# Altium PCB PCB1.PcbDoc
Units mm, origin at the board's own origin, x right, y up, seen from the top; angles counter-clockwise.
Board outline 120 x 25 mm, 2 copper layers (Top Layer, Bottom Layer); 41 components, 34 nets, 152 pads, 135 vias.
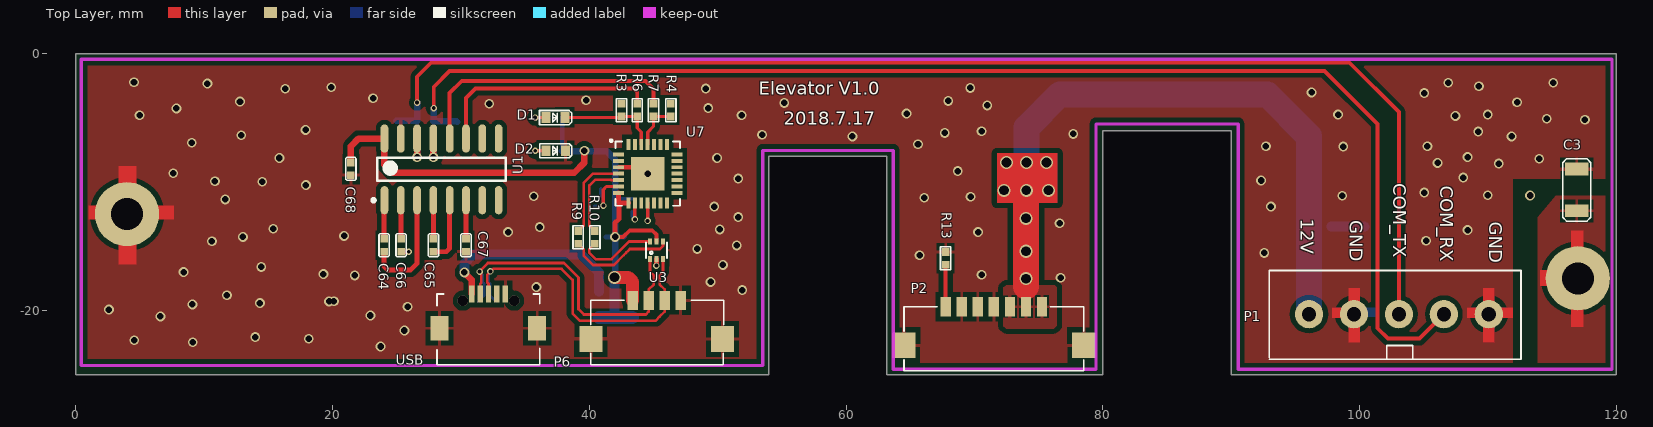
[diagram p0: Top Layer view]
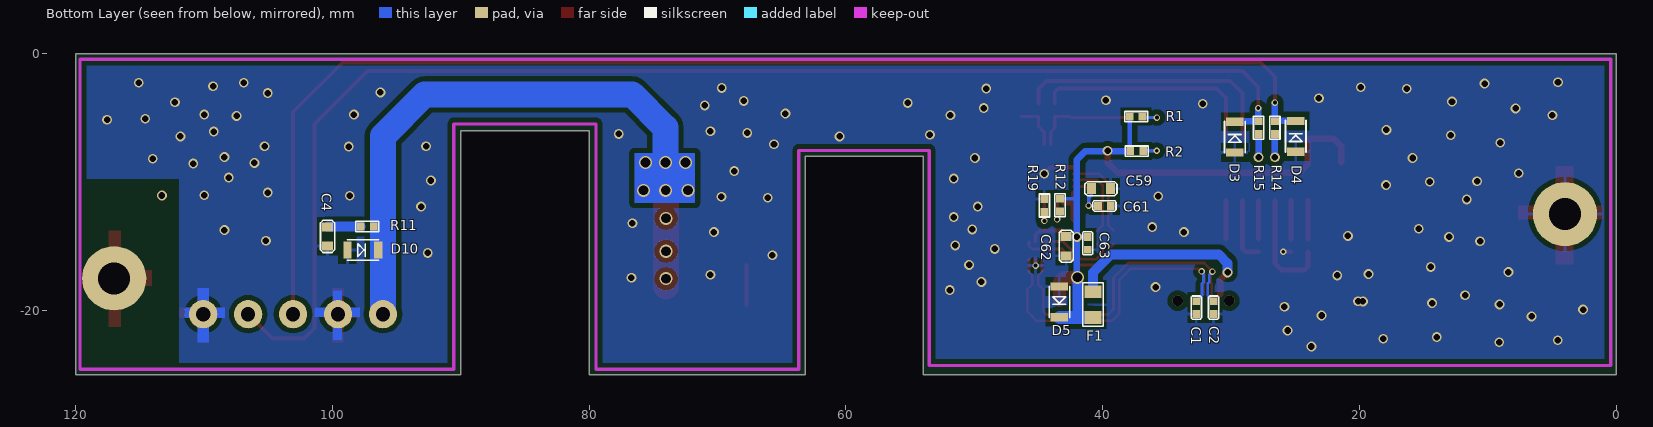
[diagram p1: Bottom Layer view, seen from below]

## Layer stack, top to bottom
Top Layer: signal copper 0.0356
Dielectric: dielectric 0.32, FR-4, Dk 4.8
Bottom Layer: signal copper 0.0356

## Board outline
0,-25 0,0 120,0 120,-25 90,-25 90,-6 79.985,-6 79.985,-25 63.17,-25 63.17,-8 54,-8 54,-25

## Design rules (kind name [scope] priority, off if disabled: settings)
Clearance [All] p1: gap=0.127
DiffPairsRouting [All] p1: maxlimit=0.254 minlimit=0.203 mostfreqgap=0.254 maxuncoupledlength=12.7
PolygonConnect [All] p1: connectstyle=Relief reliefconductorwidth=0.254 reliefentries=4 polygonreliefangle="90 Angle"
RoutingVias [All] p1: holewidth=0.711 width=1.27 viastyle="Through Hole" minholewidth=0.711 minwidth=1.27 maxholewidth=0.711 maxwidth=1.27
SilkscreenOverComponentPads [All] p1: minsilkscreentomaskgap=0.254
SolderMaskExpansion [All] p1: expansion=0.102
Width [All] p1: maxlimit=2.54 minlimit=0.203 preferedwidth=0.381
26 further rules are at their usual default settings.

## Classes and differential pairs
component class USB: C59 C61 C62 C63 D1 R1 R3 R4 R6 R7 R12 R19 U7
component class RS232: C64 C65 C66 C67 C68 D3 D4 R14 R15 U1
component class Interface: C1 C2 C3 C4 C58 D2 D5 D10 F1 P1 P2 P6 R2 R8 R9 R10 R11 R13 U3 USB
differential pair D: +D_P -D_N
differential pair DIN: +DIN_P -DIN_N
differential pair DD: +DD_P -DD_N

## Components (designator, comment, footprint, x,y, rotation, side; value= is the part's Value field where it differs from the comment)
C1 "3pF/50V/NC" 0402C 32.715,-19.279 r270 bottom
C2 "3pF/50V/NC" 0402C 31.369,-19.279 r270 bottom
C3 "1nF/1000V" 1206C 116.916,-12.243 r90 top
C4 "10uF/25V" 0603C 100.381,-14.986 r90 bottom
C59 "4.7uF/25V" 0603C 39.394,-10.516 r0 bottom
C61 "0.1uF/50V" 0402C 40.37,-11.862 r180 bottom
C62 "10uF/25V" 0603C 42.85,-14.249 r270 bottom
C63 "0.1uF/50V" 0402C 41.173,-14.275 r270 bottom
C64 "0.1uF/50V" 0402C 24.028,-14.427 r270 top
C65 "0.1uF/50V" 0402C 27.864,-14.427 r270 top
C66 "0.1uF/50V" 0402C 25.349,-14.427 r270 top
C67 "0.1uF/50V" 0402C 30.404,-14.427 r270 top
C68 "0.1uF/50V" 0402C 21.438,-9.474 r90 top
D1 "LED0" 0603LED 36.632,-4.979 r0 top
D2 "LED0" 0603LED 36.641,-7.564 r0 top
D3 "GBLC15C-LF-T7" SOD323 29.718,-7.696 r90 bottom
D4 "GBLC15C-LF-T7" SOD323 24.968,-7.645 r90 bottom
D5 "PESD5V" SOD323 43.383,-18.136 r270 bottom
D10 "PESD12V" SOD323 98.831,-15.291 r180 bottom
F1 "1A" 0805R 40.767,-18.542 r270 bottom
P1 "Header 5" KF350-5P 96.063,-20.295 r0 top
P2 "Header 7" 7×1.25mmSMT 67.767,-19.71 r0 top
P6 "Header 4" 4×1.25mmSMT 43.383,-19.22 r0 top
R1 "1K" 0402R 37.902,-4.903 r180 bottom
R2 "1K" 0402R 37.86,-7.589 r180 bottom
R3 "0/NC" 0402R 42.52,-4.902 r90 top
R4 "0/NC" 0402R 46.355,-4.902 r90 top
R6 "0" 0402R 43.739,-4.902 r90 top
R7 "0" 0402R 45.009,-4.902 r90 top
R9 "33" 0402R 39.141,-13.808 r270 top
R10 "33" 0402R 40.437,-13.808 r270 top
R11 "33" 0402R 97.79,-13.462 r180 bottom
R12 "1K/5%/1/8W" 0402R 43.332,-11.303 r270 bottom
R13 "10K/NC" 0402R 67.761,-15.443 r270 top
R14 "1K" 0402R 26.594,-5.267 r270 bottom
R15 "1K" 0402R 27.864,-5.267 r270 bottom
R19 "10K/5%/1/8W" 0402R 44.552,-11.328 r270 bottom
U1 "MAX3232ESE+" SOIC127P600X265-16N 28.499,-9.017 r90 top
U3 "NUF2042XV6T1" SOT563-6 45.237,-15.316 r0 top
U7 "CP2102" QFN28N5X5-0p5P-L 44.552,-9.347 r0 top
USB "Header 5" Micro_USB_PH 32.156,-18.72 r90 top

## Footprints (in the part's own frame and the unit in brackets; to place one, negate y for a bottom-side part, rotate by r counter-clockwise, add the part's x,y. Pads: shape width x height; smd on the part's side, far side on the other; paste and mask are expansions set on the pad)
4×1.25mmSMT [mm]
  rect 1.8x2 smd: 0(-3.25,-3) 0(7,-3)
  rect 0.8x1.5 smd: 1(0,0) 2(1.25,0) 3(2.5,0) 4(3.75,0)
  round 0.5 on Top Overlay: ""(-0.875,0.432)
  silkscreen extent -3.25,-5 7.09,0
7×1.25mmSMT [mm]
  rect 1.8x2 smd: 0(-3.25,-3) 0(10.75,-3)
  rect 0.8x1.5 smd: 1(0,0) 2(1.25,0) 3(2.5,0) 4(3.75,0) 5(5,0) 6(6.25,0) 7(7.5,0)
  round 0.5 on Top Overlay: ""(-0.95,0.432)
  silkscreen extent -3.25,-5 10.75,0
0402C [mm]
  rect 0.6x0.6 smd: 1(0,0) 2(1,0)
  silkscreen extent -0.4,-0.4 1.4,0.4
0402R [mm]
  rect 0.6x0.6 smd: 1(0,0) 2(1,0)
  silkscreen extent -0.4,-0.4 1.4,0.4
0603C [mm]
  rect 0.7x0.85 smd: 1(0,0) 2(1.5,0)
  silkscreen extent -0.5,-0.55 2,0.55
0603LED [mm]
  rect 0.7x0.85 smd: 1(0,0) 2(1.5,0)
  silkscreen extent -0.5,-0.55 2,0.55
0805R [mm]
  rect 1x1.3 smd: 1(0,0) 2(2,0)
  silkscreen extent -0.7,-0.8 2.7,0.8
1206C [mm]
  rect 1x1.8 smd: 1(0,0) 2(3.25,0)
  silkscreen extent -0.8,-1.1 4.05,1.1
KF350-5P [mm]
  round 2.2 hole 1.1: 1(0,0) 2(3.5,0) 3(7,0) 4(10.5,0) 5(14,0)
  silkscreen extent -3.1,-3.5 16.51,3.4
Micro_USB_PH [mm]
  rect 1.35x0.42 smd: 1(0,1.3) 2(0,0.65) 3(0,0) 4(0,-0.65) 5(0,-1.3)
  rect 1.9x1.4 smd: 6(-2.675,3.811) 9(-2.675,-3.789)
  round 0.82 hole 0.82 unplated: 7(-0.525,2) 8(-0.525,-2)
  silkscreen extent -5.5,-4 0,4.01
QFN28N5X5-0p5P-L [mil]
  rect 34x12 smd mask+5: 1(-89.5,59.06) 2(-89.5,39.37) 3(-89.5,19.68) 4(-89.5,0) 5(-89.5,-19.68) 6(-89.5,-39.37) 7(-89.5,-59.06) 15(89.5,-59.06) 16(89.5,-39.37) 17(89.5,-19.68) 18(89.5,0) 19(89.5,19.68) 20(89.5,39.37) 21(89.5,59.06)
  rect 12x34 smd mask+5: 8(-59.06,-89.5) 9(-39.37,-89.5) 10(-19.68,-89.5) 11(0,-89.5) 12(19.68,-89.5) 13(39.37,-89.5) 14(59.06,-89.5) 22(59.06,89.5) 23(39.37,89.5) 24(19.68,89.5) 25(0,89.5) 26(-19.68,89.5) 27(-39.37,89.5) 28(-59.06,89.5)
  rect 102.36x102.36 smd mask+5: 29(0,0)
  silkscreen extent -114,-98 98,103
SOD323 [mm]
  rect 0.65x1.35 smd: A(0,0) K(2.4,0)
  silkscreen extent -0.03,-0.8 2.44,0.8
SOIC127P600X265-16N [mm] "SOIC, 16-Leads, Body 10.0x4.0mm (max), Pitch 1.27mm, IPC Medium Density"
  oval 2.2x0.6 smd: 1(-2.4,4.445) 2(-2.4,3.175) 3(-2.4,1.905) 4(-2.4,0.635) 5(-2.4,-0.635) 6(-2.4,-1.905) 7(-2.4,-3.175) 8(-2.4,-4.445) 9(2.4,-4.445) 10(2.4,-3.175) 11(2.4,-1.905) 12(2.4,-0.635) 13(2.4,0.635) 14(2.4,1.905) 15(2.4,3.175) 16(2.4,4.445)
  silkscreen extent -2.52,-5 0.9,5.42, body extent -2,-5 2,5, height 2.65
SOT563-6 [mil] "SOT563-6"
  rect 12x18 smd: 1(-19.68,-26.57) 2(0,-26.57) 3(20,-26.57) 4(20,27) 5(0,27) 6(-19.68,27)
  silkscreen extent -31,-24 32,24

## Part data
C1 C2 C64 C65 C66 C67 C68: library part C, "C"
C3 C4 C59 C61 C62 C63: library part Cap, "Capacitor"
D1 D2: "Typical INFRARED GaAs LED"
D3 D4: library part Diode, "Default Diode"
D5 D10: library part "D Zener", "Zener Diode"
F1: library part "Fuse 1", "Fuse"
P1 USB: "Header, 5-Pin"
P2: "Header, 7-Pin"
P6: "Header, 4-Pin"
R1 R2 R9 R10 R11 R13: library part Resistor, "Resistor SMD - IEC symbol version"
R3 R4 R6 R7 R12 R14 R15 R19: library part Res2, "Resistor"
U7: "Imported"

## Free pads (board coordinates)
  round 5 hole 2.5: 0(4,-12.5) 0(117,-17.5)

## Via types
v1: diameter 0.762, hole 0.508, Top Layer to Bottom Layer, tented both sides, 72 vias
v2: diameter 0.762, hole 0.508, Top Layer to Bottom Layer, 42 vias
v3: diameter 0.508, hole 0.305, Top Layer to Bottom Layer, tented both sides, 11 vias
v4: diameter 1.016, hole 0.762, Top Layer to Bottom Layer, tented both sides, 10 vias

## Nets (pads, with @x,y where several pads share a name; then routed paths per layer and width w, separated by ;. In a path a pad name is that pad's centre, name@x,y a point inside that pad or via, vN(x,y) a via of type N, cw(c..) or ccw(c..) an arc to the next point about the centre after c; other vN are vias at no path point)
COM0_RX: D3.K P1.4 R15.1 | length 102.5
  Top Layer w0.305: v3(27.889,-4.242) 27.889,-3.912 27.889,-2.591 29.134,-1.346 97.257,-1.346 101.397,-5.486 101.397,-21.387 102.21,-22.2 104.658,-22.2 P1.4
  Bottom Layer w0.508: v3@27.889,-4.267 27.889,-5.242 R15.1 29.689,-5.267 D3.K
COM0_TX: D4.K P1.3 R14.1 | length 99.3
  Top Layer w0.305: v3(26.594,-3.81) 26.594,-1.803 27.686,-0.711 99.212,-0.711 103.063,-4.562 P1.3
  Bottom Layer w0.508: D4.K 26.572,-5.245 R14.1 v3(26.594,-3.81)
CP_RXD: R4.1 R7.1 U7.25 | length 3.7
  Top Layer w0.254: U7.25 44.552,-6.121 45.009,-5.664 R7.1 R4.1
CP_TXD: D1.2 R3.1 R6.1 U7.26 | length 7.9
  Top Layer w0.254: D1.2 42.442,-4.979 R3.1 R6.1 43.739,-5.791 44.052,-6.104 U7.26
D_N: R10.1 U7.5 | length 6.2
  Top Layer w0.203: R10.1 40.018,-13.389 40.018,-10.27 40.462,-9.826 41.711,-9.826 41.732,-9.847 U7.5
D_P: R9.1 U7.4 | length 6.9
  Top Layer w0.203: R9.1 39.56,-13.389 39.56,-10.081 39.807,-9.835 40.273,-9.369 41.711,-9.369 41.732,-9.347 U7.4
DD_N: R10.2 U3.6 | length 6.4
  Top Layer w0.203: R10.2 40.018,-15.227 40.018,-15.519 40.5,-16.002 41.732,-16.002 42.57,-15.164 43.104,-14.63 U3.6
DD_P: R9.2 U3.4 | length 8.8
  Top Layer w0.203: R9.2 39.56,-15.227 39.56,-15.709 40.311,-16.459 41.922,-16.459 42.678,-15.703 ; 42.894,-15.487 42.678,-15.703 ; U3.4 45.745,-14.986 45.517,-15.215 43.166,-15.215 42.678,-15.703
DIN_N: C2.1 P6.2 U3.1 USB.2 | length 25.5
  Top Layer w0.203: USB.2 31.506,-17.932 31.603,-17.836 31.603,-17.125 v3(31.458,-16.98) 31.458,-16.956 32.107,-16.307 38.035,-16.307 39.167,-17.438 39.167,-19.901 39.58,-20.314 42.043,-20.314 44.41,-20.314 44.633,-20.091 P6.2 44.633,-18.364 45.03,-17.968 45.03,-17.297 44.737,-17.005 U3.1
  Bottom Layer w0.203: C2.1 31.813,-18.834 31.813,-17.907 31.699,-17.793 31.699,-17.221 v3(31.458,-16.98)
DIN_P: C1.1 P6.3 U3.3 USB.3 | length 26.1
  Top Layer w0.203: USB.3 32.156,-17.932 32.06,-17.836 32.06,-17.216 v3(32.309,-16.967) 32.512,-16.764 37.846,-16.764 38.71,-17.628 38.71,-20.244 39.256,-20.79 41.872,-20.79 45.185,-20.79 45.484,-20.491 45.883,-20.091 P6.3 45.883,-18.364 45.487,-17.968 45.487,-17.272 45.745,-17.013 U3.3
  Bottom Layer w0.203: v3(32.309,-16.967) 32.258,-16.967 32.156,-17.069 32.156,-17.793 32.271,-17.907 32.271,-18.834 C1.1
EARTH: C3.1 pad.0@117,-17.5 | length 0.1
  Top Layer w1.27: pad.0@116.942,-17.442 pad.0@117,-17.5
GND: C1.2 C2.2 C3.2 C4.1 C59.1 C61.2 C62.2 C63.2 C66.2 C67.2 C68.1 D2.2 D3.A D4.A D5.A D10.A P1.2 P1.5 P2.0 P2.2 P2.3 P2.4 P6.0 P6.4 pad.0@4,-12.5 R13.1 R19.1 U1.15 U3.2 U7.3 U7.29 USB.5 USB.6 USB.9 | length 3.6
  Top Layer w0.381: C66.2 v3(25.943,-15.427) ; U7.3 44.052,-8.847 v1(44.552,-9.347) ; v3(45.237,-16.51) U3.2
  other v1: 23.749,-22.809 9.119,-22.479 13.995,-22.073 6.604,-20.472 22.962,-20.396 25.857,-19.71 14.351,-19.431 19.736,-19.304 11.786,-18.821 35.89,-18.186 49.454,-17.78 76.708,-17.45 70.561,-17.221 19.304,-17.17 8.407,-17.018 65.735,-15.697 92.583,-15.519 48.412,-15.215 51.486,-14.935 10.617,-14.605 20.904,-14.199 33.68,-13.894 70.282,-13.894 15.392,-13.64 36.144,-13.513 76.632,-13.208 49.733,-11.913 93.091,-11.913 11.659,-11.354 66.091,-11.227 35.687,-11.1 98.654,-11.074 109.982,-11.024 105.029,-10.82 17.932,-10.236 10.846,-9.931 68.707,-9.144 113.995,-8.179 15.875,-8.128 49.962,-8.128 108.407,-8.052 98.73,-7.239 92.71,-7.214 105.283,-7.214 9.042,-6.934 60.503,-6.452 111.836,-6.452 77.699,-6.248 67.691,-6.172 70.561,-6.045 117.551,-5.156 51.867,-4.801 64.719,-4.674 70.993,-4.039 32.207,-3.912 55.194,-3.835 39.751,-3.632 105.029,-3.073 96.266,-3.023 16.332,-2.743 49.073,-2.718 19.914,-2.616 109.296,-2.54 10.262,-2.337 115.087,-2.261 4.547,-2.235
  other v2: 4.572,-22.327 18.161,-22.2 25.603,-21.565 2.591,-19.939 9.093,-19.533 20.117,-19.279 51.918,-18.415 21.742,-17.272 14.453,-16.612 50.419,-16.459 105.181,-14.58 13.03,-14.275 108.407,-13.741 50.165,-13.691 51.613,-12.725 69.698,-11.151 14.529,-9.982 92.329,-9.881 51.613,-9.728 108.077,-9.652 7.595,-9.322 110.846,-8.56 106.07,-8.509 65.608,-7.061 12.903,-6.35 53.467,-6.325 109.245,-6.071 17.907,-5.944 114.579,-5.08 107.467,-4.851 4.978,-4.801 98.323,-4.75 109.982,-4.75 7.849,-4.267 49.276,-4.242 112.268,-3.785 12.802,-3.734 67.97,-3.683 23.165,-3.48 69.672,-2.667 106.909,-2.261
NetC4_2: C4.2 R11.1 | length 2.6
  Bottom Layer w0.762: R11.1 100.357,-13.462 C4.2
NetC59_2: C59.2 C61.1 U7.6 | length 4.7
  Top Layer w0.254: v3(41.097,-11.836) 41.097,-10.592 41.342,-10.347 U7.6
  Bottom Layer w0.254: C61.1 41.072,-11.862 v3(41.097,-11.836) 41.097,-11.227 40.894,-11.024 C59.2
NetC64_1: C64.1 U1.1 | length 3
  Top Layer w0.381: C64.1 24.028,-11.442 U1.1
NetC64_2: C64.2 U1.3 | length 9
  Top Layer w0.381: C64.2 24.028,-16.586 24.282,-16.84 26.086,-16.84 26.594,-16.332 U1.3
NetC65_1: C65.1 U1.4 | length 3
  Top Layer w0.381: C65.1 U1.4
NetC65_2: C65.2 U1.5 | length 5.1
  Top Layer w0.381: C65.2 28.87,-15.427 29.134,-15.164 U1.5
NetC66_1: C66.1 U1.2 | length 3
  Top Layer w0.381: U1.2 25.349,-11.442 C66.1
NetC67_1: C67.1 U1.6 | length 3
  Top Layer w0.381: C67.1 U1.6
NetD1_1: D1.1 R1.2 | length 2
  Top Layer w0.254: v3(35.79,-4.979) D1.1
  Bottom Layer w0.254: v3(35.79,-4.979) 36.826,-4.979 R1.2
NetD2_1: D2.1 R2.2 | length 1.9
  Top Layer w0.254: v3(35.798,-7.564) D2.1
  Bottom Layer w0.254: v3(35.798,-7.564) 36.834,-7.564 R2.2
NetF1_1: F1.1 USB.1 | length 15.5
  Top Layer w0.508: v1(30.277,-17.043) 30.856,-17.623 USB.1
  Bottom Layer w0.762: v1(30.277,-17.043) 30.277,-16.332 30.963,-15.646 39.37,-15.646 40.767,-17.043 F1.1
NetP2_1: P2.1 R13.2 | length 3.1
  Top Layer w0.305: P2.1@67.761,-19.575 R13.2
NetR12_2: R12.2 U7.9 | length 2
  Top Layer w0.254: v3(43.552,-12.913) U7.9
  Bottom Layer w0.254: R12.2 43.332,-12.693 v3(43.552,-12.913)
NetR14_2: R14.2 U1.14 | length 3.3
  Top Layer w0.508: v1(26.594,-8.077) U1.14
  Bottom Layer w0.508: v1(26.594,-8.077) R14.2
NetR15_2: R15.2 U1.13 | length 3.3
  Top Layer w0.508: v1(27.864,-8.077) U1.13
  Bottom Layer w0.508: v1(27.864,-8.077) R15.2
NetR19_2: R19.2 U7.11 | length 2.1
  Top Layer w0.254: v3(44.552,-13.03) U7.11
  Bottom Layer w0.254: v3(44.552,-13.03) R19.2
RXD_USB: R4.2
TXD_USB: R3.2
UART2_RX: R7.2 U1.12 | length 21.2
  Top Layer w0.305: U1.12 29.134,-5.461 29.134,-4.623 29.134,-3.073 30.074,-2.134 32.41,-2.134 44.374,-2.134 45.009,-2.769 R7.2
UART2_TX: R6.2 U1.11 | length 17.8
  Top Layer w0.305: U1.11 30.404,-4.75 30.404,-3.454 31.14,-2.718 32.715,-2.718 43.459,-2.718 43.739,-2.997 R6.2
VCC: C62.1 C63.1 C68.2 D5.K F1.2 P6.1 R1.1 R2.1 R12.1 U1.16 U3.5 U7.7 U7.8 | length 59.4
  Top Layer w0.305: v1(42.012,-14.275) 42.647,-14.275 43.155,-13.767 44.907,-13.767 45.237,-14.097 U3.5
  Top Layer w0.381: v1(42.012,-14.275) 42.012,-13.183 42.329,-12.865 42.329,-11.62 U7.8 ; 42.278,-11.57 U7.7
  Top Layer w0.508: C68.2 21.438,-7.214 22.034,-6.617 U1.16 24.054,-8.636 24.689,-9.271 38.837,-9.271 39.624,-8.484 v1(39.624,-7.569)
  Top Layer w1.016: v4(41.961,-17.424) 43.028,-17.424 43.383,-17.78 P6.1
  Bottom Layer w0.305: 42.037,-11.303 R12.1
  Bottom Layer w0.381: R2.1 37.902,-7.546 R1.1 ; C63.1@41.3,-14.275 v1(42.012,-14.275) 42.723,-14.275 C62.1@42.748,-14.249 ; v4(41.961,-17.424) v4@42.012,-17.374
  Bottom Layer w0.508: R2.1 40.132,-7.589 41.346,-7.589 42.012,-8.255 v1(42.012,-14.275) v4@42.012,-17.374 ; 41.961,-20.517 41.986,-20.542 ; D5.K@43.377,-20.542 D5.K
  Bottom Layer w0.762: 41.961,-20.517 v4(41.961,-17.424)
  Bottom Layer w1.016: F1.2 41.986,-20.542 D5.K@43.377,-20.542
VCC_12V: D10.K P1.1 P2.5 P2.6 P2.7 R11.2 | length 50
  Top Layer w2.032: 74.017,-18.148 v4(74.017,-12.827) v4@74.017,-10.363
  Bottom Layer w2.032: 74.066,-9.703 74.066,-5.766 76.657,-3.175 92.812,-3.175 96.063,-6.426 96.063,-15.291 P1.1
  other v4: 74.017,-17.526 74.017,-15.392 72.314,-10.643 74.041,-10.643 75.768,-10.643 72.492,-8.484 74.054,-8.484 75.616,-8.484
pads on no net: P2. P6. U1.7 U1.8 U1.9 U1.10 U7.1 U7.2 U7.10 U7.12 U7.13 U7.14 U7.15 U7.16 U7.17 U7.18 U7.19 U7.20 U7.21 U7.22 U7.23 U7.24 U7.27 U7.28 USB.4 USB.7 USB.8
copper on no net:
  other v2: 113.284,-11.049

## Polygon pours and split planes (outlines as drawn)
GND on Top Layer "Mid-Layer 1-No Net" (solid, remove dead copper, pour order 1002): 119.101,-9.728 111.963,-9.728 111.938,-9.754 111.938,-10.211 111.938,-25.248 111.862,-25.324 111.709,-25.171 -1.067,-25.171 -1.067,0.737 -1.295,0.965 -0.864,1.397 119.355,1.397 120.117,1.397 120.675,0.838 120.396,0.559 120.396,-7.874 120.396,-9.195 119.939,-9.652 119.863,-9.728 119.101,-9.728
EARTH on Top Layer "Mid-Layer 1-No Net" (solid, remove dead copper, pour order 1001): 119.604,-11.07 115.287,-11.07 114.741,-11.72 113.894,-12.727 113.894,-15.748 113.894,-24.746 114.358,-25.298 114.85,-24.714 120.396,-24.714 120.396,-11.915 119.604,-10.973
VCC_12V on Top Layer "Mid-Layer 1-No Net" (solid, remove dead copper, pour order 1000): 72.263,-18.644 72.263,-20.777 72.263,-21.234 72.41,-21.361 72.468,-21.412 74.844,-21.412 76.194,-21.412 76.341,-21.285 76.429,-21.209 76.429,-20.625 76.429,-18.186 76.253,-18.034 74.61,-18.034 72.468,-18.034 72.292,-18.186 72.263,-18.212 72.263,-18.644
GND on Bottom Layer "Mid-Layer 1-No Net" (solid, remove dead copper, pour order 1003): 119.101,-9.728 111.963,-9.728 111.938,-9.754 111.938,-10.211 111.938,-25.248 111.862,-25.324 111.709,-25.171 -1.067,-25.171 -1.067,0.737 -1.295,0.965 -0.864,1.397 119.355,1.397 120.117,1.397 120.675,0.838 120.396,0.559 120.396,-7.874 120.396,-9.195 119.939,-9.652 119.863,-9.728 119.101,-9.728

## Keep-outs
Keep-Out Layer:
  lines w0.254: 0.432,-24.282 53.518,-24.282 53.518,-7.544 63.678,-7.544 63.678,-24.587 79.477,-24.587 79.477,-5.486 90.551,-5.486 90.551,-24.587 119.659,-24.587 119.659,-0.432 0.432,-0.432 0.432,-24.282

## Other copper
Top Layer:
  rectangle net GND: 97.856,-20.585 99.69,-19.787
  rectangle net GND: 99.126,-22.504 100.015,-18.263
  rectangle net GND: 109.626,-22.504 110.515,-18.263
  rectangle net GND: 108.356,-20.585 111.938,-19.787
  rectangle net EARTH: 114.046,-18.11 117.373,-16.84
  rectangle net EARTH: 116.459,-21.311 117.424,-13.792
  rectangle net GND: 3.327,-16.408 4.75,-8.763
  rectangle net GND: 1.016,-12.929 7.645,-11.811
  rectangle net VCC_12V: 71.755,-11.633 76.479,-7.747
Bottom Layer:
  rectangle net GND: 108.356,-20.585 111.522,-19.787
  rectangle net GND: 109.626,-22.504 110.515,-18.263
  rectangle net GND: 97.856,-20.523 101.397,-19.787
  rectangle net GND: 99.238,-22.301 99.949,-18.466
  rectangle net VCC_12V: 71.755,-11.633 76.479,-7.747

## Silkscreen, mask and mechanical layers (free items; w line width, h text height)
Top Overlay:
  text "Elevator V1.0" at 53.213,-3.2 h1.02
  text "2018.7.17" at 55.169,-5.537 h1.02
  text "COM_TX" at 102.641,-10.109 h1.02 r270
  text "COM_RX" at 106.274,-10.287 h1.02 r270
  text "12V" at 95.428,-12.878 h1.02 r270
  text "GND" at 99.238,-12.979 h1.02 r270
  text "GND" at 110.109,-13.081 h1.02 r270
Mechanical 1:
  lines w0.254: 53.975,-8 63.17,-8 63.17,-25 79.985,-25 79.985,-6 90,-6 90,-25 120,-25 120,0 0,0 0,-25 54,-25 54,-8